# Altium PCB Boost.PcbDoc
Units mil, origin at the board's own origin, x right, y up, seen from the top; angles counter-clockwise.
Board outline 6000 x 4000 mil, 2 copper layers (Top Layer, Bottom Layer); 28 components, 16 nets, 67 pads, 0 vias.
Unrouted connection lines stored in the file: 51.
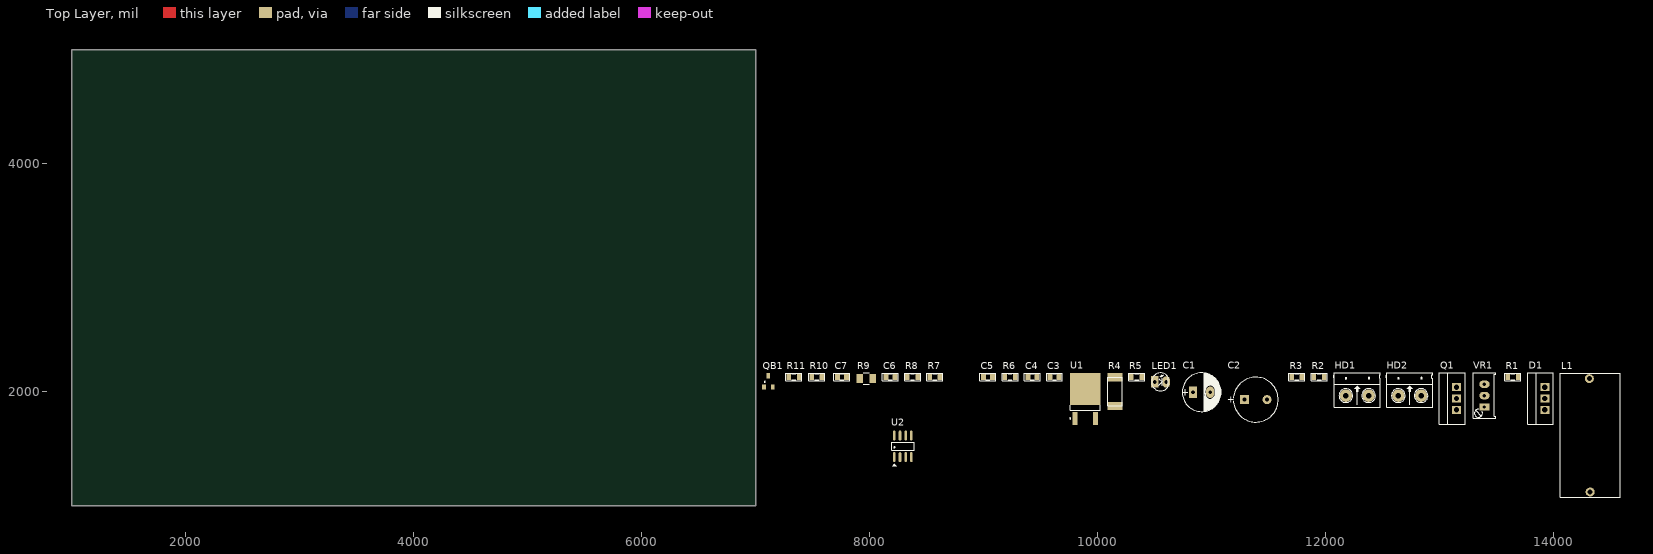
[diagram p0: Top Layer view]
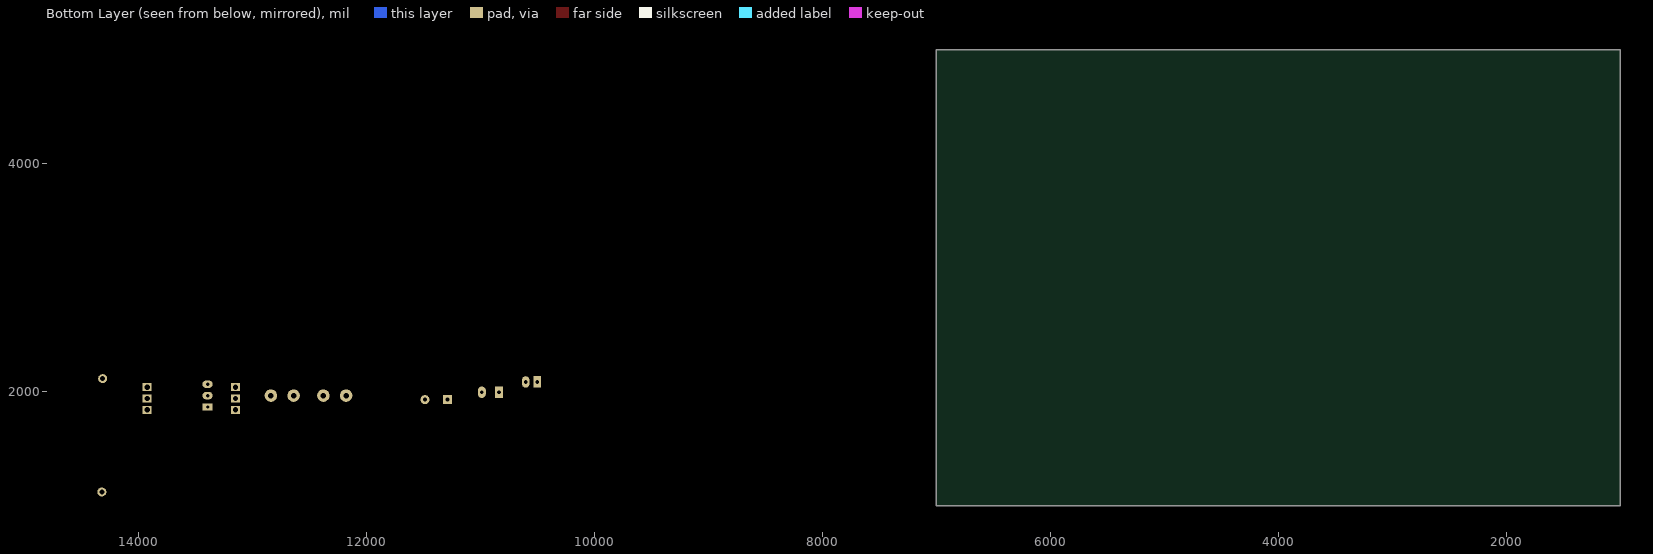
[diagram p1: Bottom Layer view, seen from below]

## Layer stack, top to bottom
Top Solder: solder mask 0.4, Solder Resist, Dk 3.5
Top Layer: signal copper 1.4
Dielectric 1: dielectric 12.6, FR-4, Dk 4.8
Bottom Layer: signal copper 1.4
Bottom Solder: solder mask 0.4, Solder Resist, Dk 3.5

## Board outline
1000,1000 7000,1000 7000,5000 1000,5000

## Design rules (kind name [scope] priority, off if disabled: settings)
Clearance Clearance_HV [InNetClass('HV')] p1: gap=30 ignorepadtopadclearanceinfootprint=FALSE
Clearance Clearance_LV [All] p2: gap=10 ignorepadtopadclearanceinfootprint=FALSE
PolygonConnect [All] p1: connectstyle=Relief reliefconductorwidth=10 reliefentries=4 polygonreliefangle="90 Angle" airgapwidth=10
RoomDefinition BoostUC3843 [InComponentClass('BoostUC3843')] p1: confinementstyle=ConfineIn formatcopy=TRUE lockcomponents=FALSE outline 7045,1060 14595,1060 14595,2275 7045,2275
RoutingVias [All] p1: holewidth=28 width=50 viastyle="Through Hole" minholewidth=28 minwidth=50 maxholewidth=28 maxwidth=50
SolderMaskExpansion [All] p1: expansion=4 istentingtop=FALSE
Width Width_power [InNetClass('Power')] p1: maxlimit=70 minlimit=30 preferedwidth=50 minimp=50.000000 maximp=50.000000 favimp=50.000000
Width Width_signal [All] p2: maxlimit=30 minlimit=10 preferedwidth=20 minimp=50.000000 maximp=50.000000 favimp=50.000000
30 further rules are at their usual default settings.

## Components (designator, comment, footprint, x,y, rotation, side; value= is the part's Value field where it differs from the comment)
C1 "100uF/35V" CP1.5/3.4 10835,1995 r0 top value=100uF/35V/50V
C2 "100uF/35V" CA-ALU-10GR 11385,1930 r0 top value=100uF/35V/50V
C3 "0.1uF" CN-SMD-0805 9620,2130 r0 top value=103
C4 "100pF" CN-SMD-0805 9425,2130 r0 top value=103
C5 "0.1uF" CN-SMD-0805 9035,2130 r0 top value=103
C6 "100pF" CN-SMD-0805 8180,2130 r0 top value=103
C7 "1nF" CN-SMD-0805 7755,2130 r0 top value=103
D1 "Diode" TO-220 13920,1940 r90 top
HD1 "220VAC" HED2 12175,1965 r0 top value="Header 2"
HD2 "220VAC" HED2 12635,1965 r0 top value="Header 2"
L1 "150mH" 0077930A7-core 14315,1605 r90 top value="150 mH"
LED1 "LED" LED-3 10500,2085 r0 top value="LED 3 ly Single Colour"
Q1 "IRF840" TO-220 13145,1940 r90 top
QB1 "2SC5200" SOT23 7110,2090 r0 top value=D718
R1 "1k" RES-SMD-0805 13640,2130 r0 top value="R1/4W - 1K"
R2 "1k" RES-SMD-0805 11940,2130 r0 top value="R1/4W - 1K"
R3 "1k" RES-SMD-0805 11745,2130 r0 top value="R1/4W - 1K"
R4 "1R" RES-SMD-2512 10155,2000 r90 top value="R1/4W - 1K"
R5 "1k" RES-SMD-0805 10340,2130 r0 top value="R1/4W - 1K"
R6 "100k" RES-SMD-0805 9230,2130 r0 top value="R1/4W - 1K"
R7 "56k" RES-SMD-0805 8570,2130 r0 top value="R1/4W - 1K"
R8 "470R" RES-SMD-0805 8375,2130 r0 top value="R1/4W - 1K"
R9 "39R" R1206 7970,2115 r0 top value="R1/4W - 1K"
R10 "15K" RES-SMD-0805 7535,2130 r0 top value="R1/4W - 1K"
R11 "5K1" RES-SMD-0805 7335,2130 r0 top value="R1/4W - 1K"
U1 "7809" TO-252 9890,1930 r90 top
U2 "UC3843AN" SO-8 8290,1520.51 r90 top
VR1 "10K" VR1 13390,1865 r90 top value="VR 10K"

## Footprints (in the part's own frame and the unit in brackets; to place one, negate y for a bottom-side part, rotate by r counter-clockwise, add the part's x,y. Pads: shape width x height; smd on the part's side, far side on the other; paste and mask are expansions set on the pad)
0077930A7-core [mm]
  round 2 hole 1.1: 1(12.93,0.12) 2(-12.32,-0.05)
  silkscreen extent -13.52,-6.81 14.17,6.57
CA-ALU-10GR [mm] "Polarized capacitors, Aluminum Electrolytic Capacitors, 2-Leads, Body 10x20x5x0.6"
  rect 2x2 hole 0.9: 1(-2.5,0)
  round 2 hole 0.9: 2(2.5,0)
  silkscreen extent -5,-5 5,5, body extent -4.88,-4.93 4.88,4.83, height 13.12
CN-SMD-0805 [mil]
  rect 43.31x55 smd: 1(-39.36,0.01) 2(39.37,0.01)
  silkscreen extent -70,-34 70,33, body extent -39,-25 39,25, height 31
CP1.5/3.4 [mil] "Tu hoa 220->470uF,16V, 470uF/16V,25V"
  rect 70x100 hole 32: 1(0,0)
  oval 70x100 hole 32: 2(150,0)
  silkscreen extent -95,-170 245,170, body extent -85,-157 230,157, height 446
HED2 [mil] "Header 2, 2 pin, hight 300mil, Pin to Pin 200, Colour Green"
  round 110 hole 50: 1(0,0) 2(200,0)
  silkscreen extent -106,-100 300,200, body extent -92,-140 302,155, height 394
LED-3 [mil] "LED 2 PIN, 3ly Only colour"
  rect 65x100 hole 32: 1(0,0)
  oval 65x100 hole 32: 2(100,0)
  silkscreen extent -29,-78 118,79, body extent -13,-75 125,75, height 217
R1206 [mm]
  rect 1.45x2.1 smd: 1(-1.475,0) 2(1.475,0)
  silkscreen extent -0.64,-1.27 0.64,1.27, body extent -1.6,-0.84 1.6,0.76, height 1
RES-SMD-0805 [mil]
  rect 39.37x55 smd: 1(-45,0) 2(45,0)
  silkscreen extent -70,-34 70,33, body extent -39,-25 39,25, height 31
RES-SMD-2512 [mm] "Chip Capacitor, Body 3.2x2.5mm, IPC Medium Density"
  rect 1.8x3.3 smd: 1(-3.2,0.127) 2(3.2,0.127)
  silkscreen extent -3.2,-1.47 3.2,1.73, body extent -3.2,-1.47 3.2,1.73, height 0.6
SO-8 [mm] "8-Pin Small Outline Integrated Circuit 1.27 mm Pitch, IPC Medium Density"
  oval 2.2x0.6 smd: 1(-2.4,1.905) 2(-2.4,0.635) 3(-2.4,-0.635) 4(-2.4,-1.905) 5(2.4,-1.905) 6(2.4,-0.635) 7(2.4,0.635) 8(2.4,1.905)
  silkscreen extent -4.44,-2.5 0.9,2.5, body extent -2.89,-2.43 3.15,2.59, height 1.6
SOT23 [mm] "SOT 23 _ 1-3-2"
  rect 0.85x1.2 smd: 1(-0.94,-1.245) 2(0.985,-1.25) 3(0.005,1.25)
  silkscreen extent -0.88,-0.25 -0.64,0, body extent -1.47,-1.33 1.53,1.17, height 1.06
TO-220 [mm]
  rect 1.8x2 hole 1.2: 1(-2.54,0) 2(0,0) 3(2.54,0)
  silkscreen extent -5.71,-1.91 5.71,3.81, body extent -4.92,-2.13 4.98,2.37, height 8.08
TO-252 [mm] "KVU D-PAK, 3-Pads, Body 6,2x6,7mm (max), IPC Medium Density"
  rect 2.85x1.05 smd: 1(-4.2,2.29) 3(-4.2,-2.29)
  rect 7.1x6.8 smd: 2(2.4,0)
  silkscreen extent -4.32,-3.35 -1.27,3.49, body extent -5.03,-3.35 5.08,3.35, height 2.4
VR1 [mil] "Variable Resistor"
  rect 65x90 hole 30: 1(0,0)
  oval 65x90 hole 30: 2(100,0) 3(200,0)
  silkscreen extent -100,-100 301,100, body extent -88,-130 288,110, height 455

## Part data
C1 C2: library part CP3, "Cap 100uF/35V - 470uF/16V", Description 1="1000uF/6,3V - 470uF/16V - 330uF - 25V", Description 2="220uF/35V - 100uF/50V - 63V - 4,7uF/200V", Description 3="22uF => 33uF100V - 3,3uF => 4,7uF/250V", Description 4="2,2uF =>3,3uF/350 - 2,2uF/400V - 1uF/450V"
C3 C4 C5 C6 C7: library part CM, "Cap SMD"
HD1 HD2: library part Hed2, "Header 2 (Green)"
L1: library part L1, "Inductor"
LED1: "LED Single colour Green and Red"
Q1: "MOSFET N - CHANNEL 500V - 0.75 - 8A - TO-220"
QB1: "Transistor Power Supply"
R1 R2 R3 R4 R5 R6 R7 R8 R9 R10 R11: library part RES_SMD, "Resistor 1/4W"
U1: "Positive Voltage Regulator", ComponentLink1Description="Manufacturer Link", ComponentLink1URL=http://www.st.com/, ComponentLink2Description=Datasheet, ComponentLink2URL=http://www.st.com/stonline/products/literature/ds/2146/l78m05c.pdf, DatasheetVersion=Apr-1994, LatestRevisionDate=17-Jul-2002, LatestRevisionNote="Re-released for DXP Platform.", Note="Tab is connected to pin 3 (GND).", PackageDescription="SIP; 3 Leads; Body 10.9 x 7.6 x 2.6 mm (typ); Pitch 2.2 mm", PackageReference=SOT82C, Published=24-Aug-2001, Publisher="Altium Limited"
U2: "High-Performance Current Mode PWM Controller", Code_JEDEC=MO-001-AN, ComponentLink1Description="Manufacturer Link", ComponentLink1URL=http://www.st.com/, ComponentLink2Description=Datasheet, ComponentLink2URL=http://www.st.com/stonline/products/literature/ds/4298/uc3842a.pdf, DatasheetVersion=Mar-1999, LatestRevisionDate=06-Jun-2005, LatestRevisionNote="Stylized 3D Model Added.", PackageDescription="DIP; 8 Leads; Row Spacing 7.62 mm; Pitch 2.54 mm", PackageReference=DIP8, Published=24-Aug-2001, Publisher="Altium Limited"
VR1: library part VR, "Var Resistor"

## Nets (pads, with @x,y where several pads share a name; then routed paths per layer and width w, separated by ;. In a path a pad name is that pad's centre, name@x,y a point inside that pad or via, vN(x,y) a via of type N, cw(c..) or ccw(c..) an arc to the next point about the centre after c; other vN are vias at no path point)
CS: Q1.3 R3.1 R4.2 R8.2
D_fet: D1.1 D1.3 L1.2 Q1.2
FB: C4.2 R2.1 R5.2 R7.2 U2.2
Gate: Q1.1 R3.2 R9.2
GND: C1.2 C2.2 C3.1 C5.1 C6.1 C7.1 HD1.2 HD2.2 LED1.2 R4.1 R5.1 U1.2 U2.5
NetC4_1: C4.1 R7.1 U2.1
NetC6_2: C6.2 R6.2 R8.1 R11.2 U2.3
NetC7_2: C7.2 QB1.1 R10.2 U2.4
NetLED1_1: LED1.1 R1.1
NetQB1_3: QB1.3 R11.1
NetR2_2: R2.2 VR1.1
NetR9_1: R9.1 U2.6
VCC: C1.1 HD1.1 L1.1 R6.1 U1.1
VDD: C5.2 U1.3 U2.7
Vout: C2.1 D1.2 HD2.1 R1.2 VR1.2 VR1.3
Vref: C3.2 QB1.2 R10.1 U2.8

## Text inside footprints (layer, text, board x,y; h text height)
C2: Top Overlay "+" at 11135.98,1900.98 h59.06